# Altium PCB ShifterMatic.PcbDoc
Units mil, origin at the board's own origin, x right, y up, seen from the top; angles counter-clockwise.
Board outline 1200 x 1300 mil, 4 copper layers (Top (L1), GND (L2), Signal (L3), Bottom (L4)), stack 64.6 mil thick; 33 components, 20 nets, 92 pads, 38 vias.
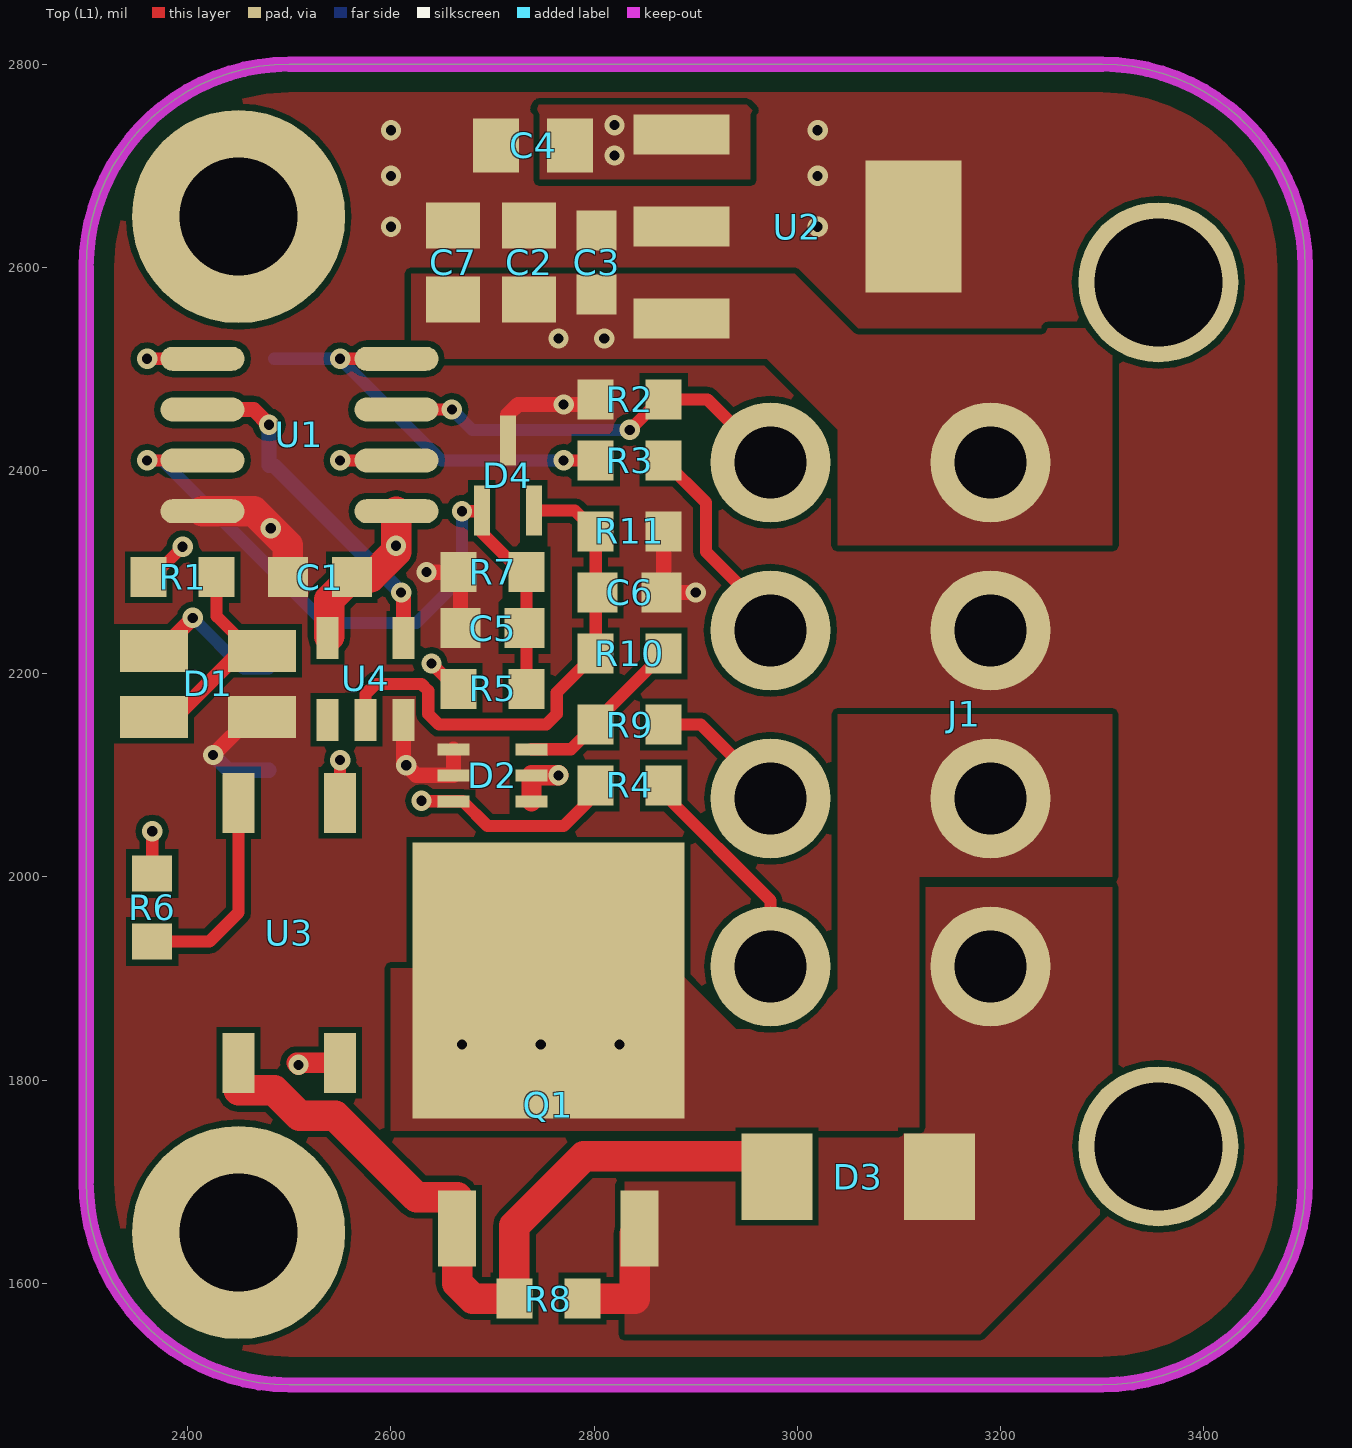
[diagram p0: Top (L1) view]
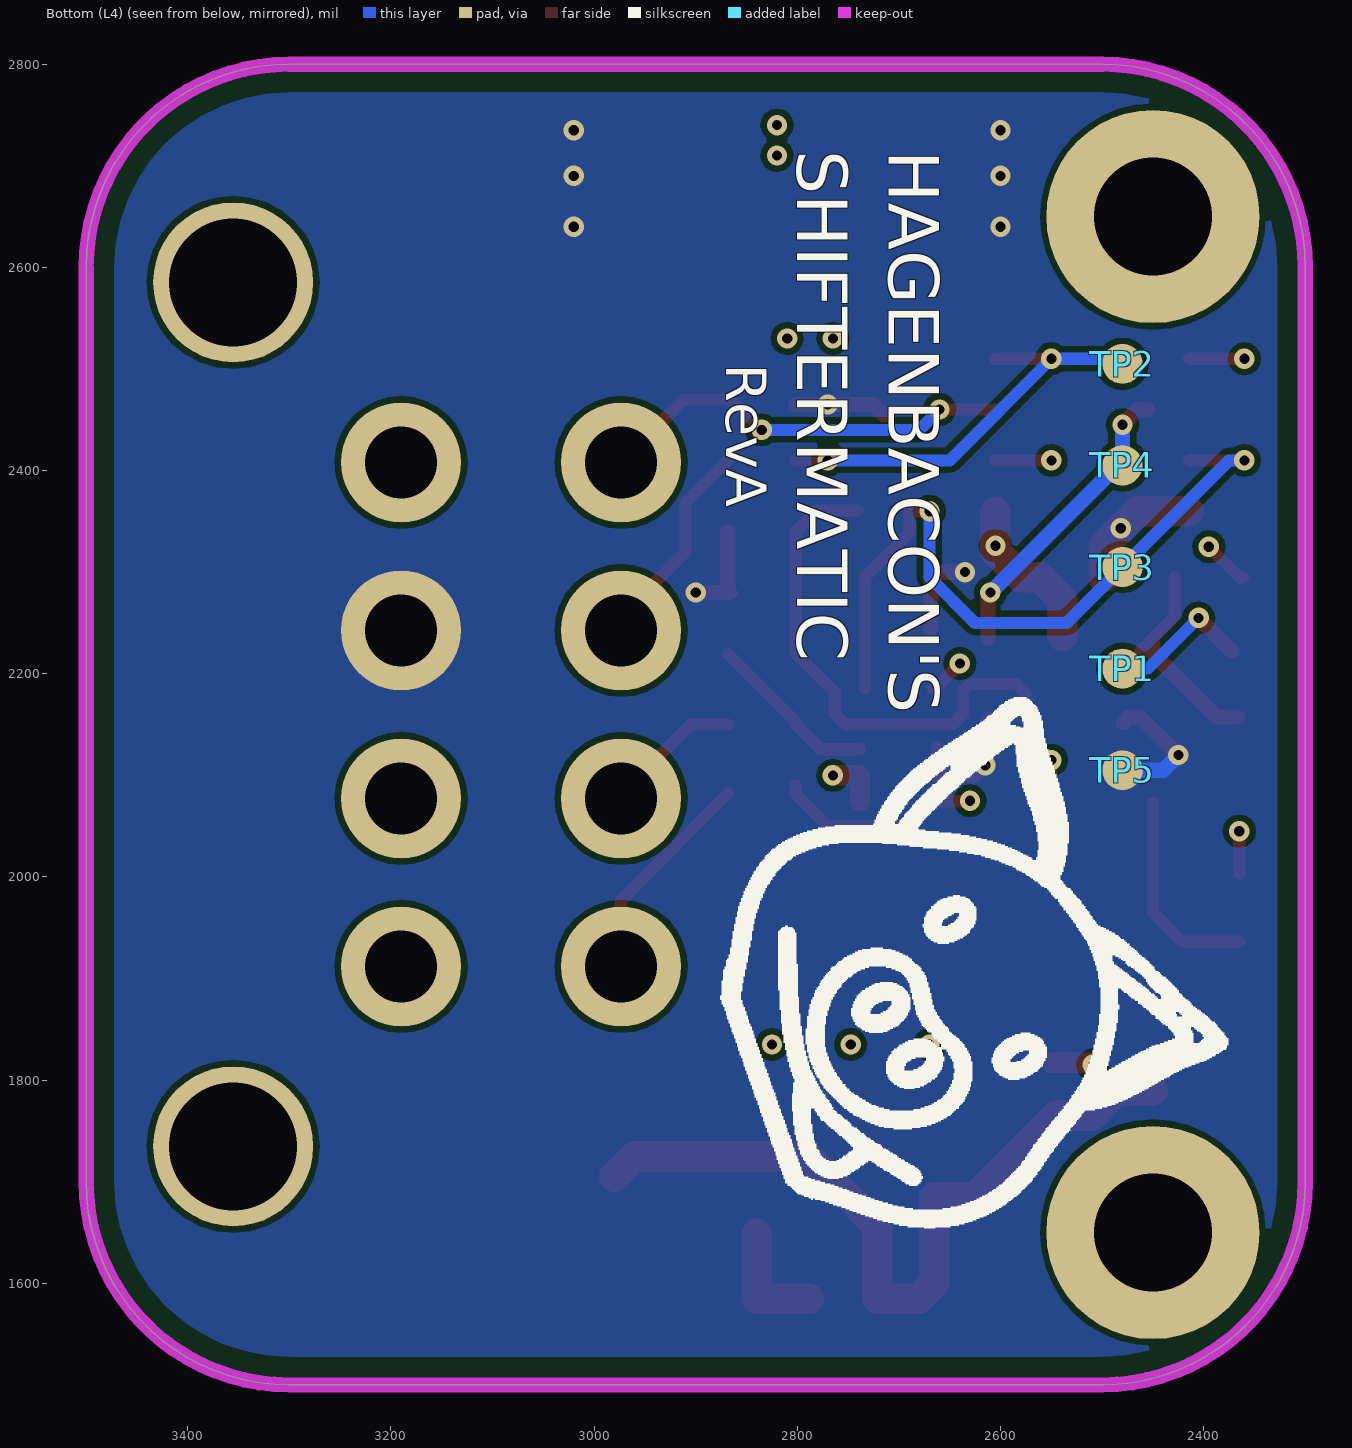
[diagram p1: Bottom (L4) view, seen from below]
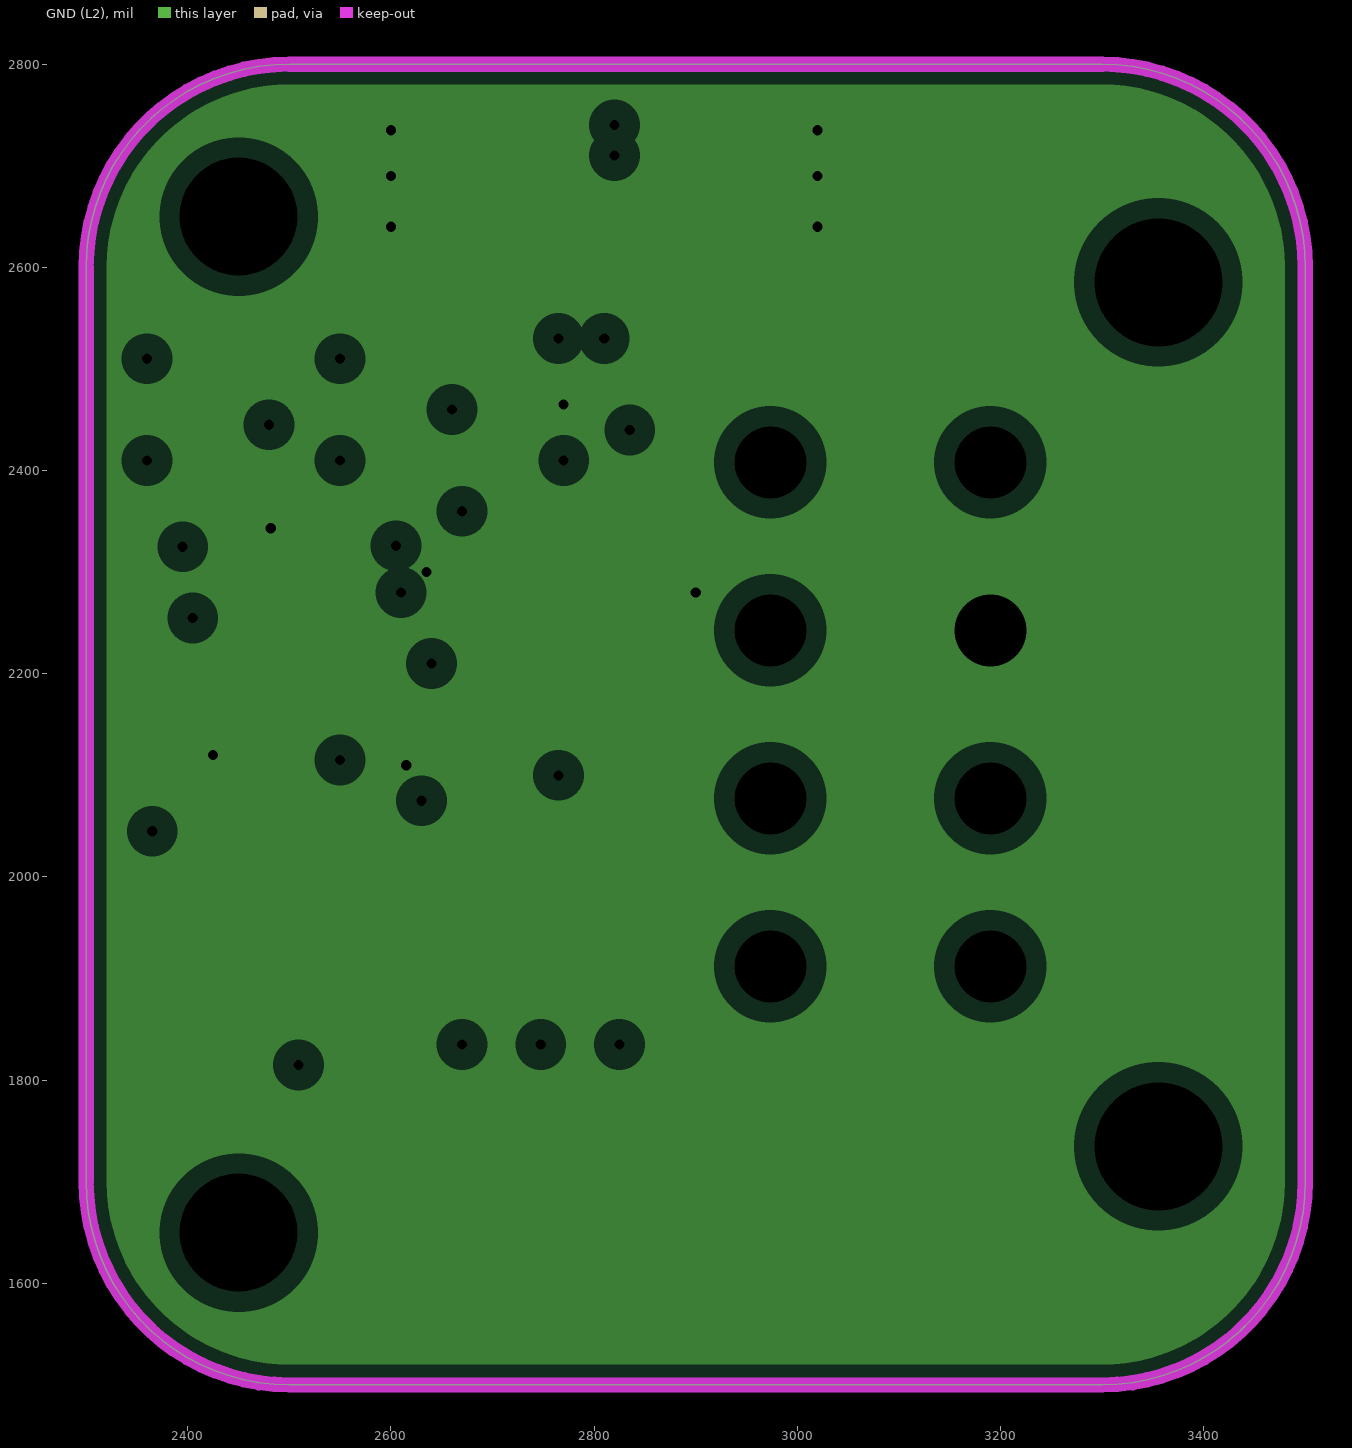
[diagram p2: GND (L2), clearances drawn from the general rule]
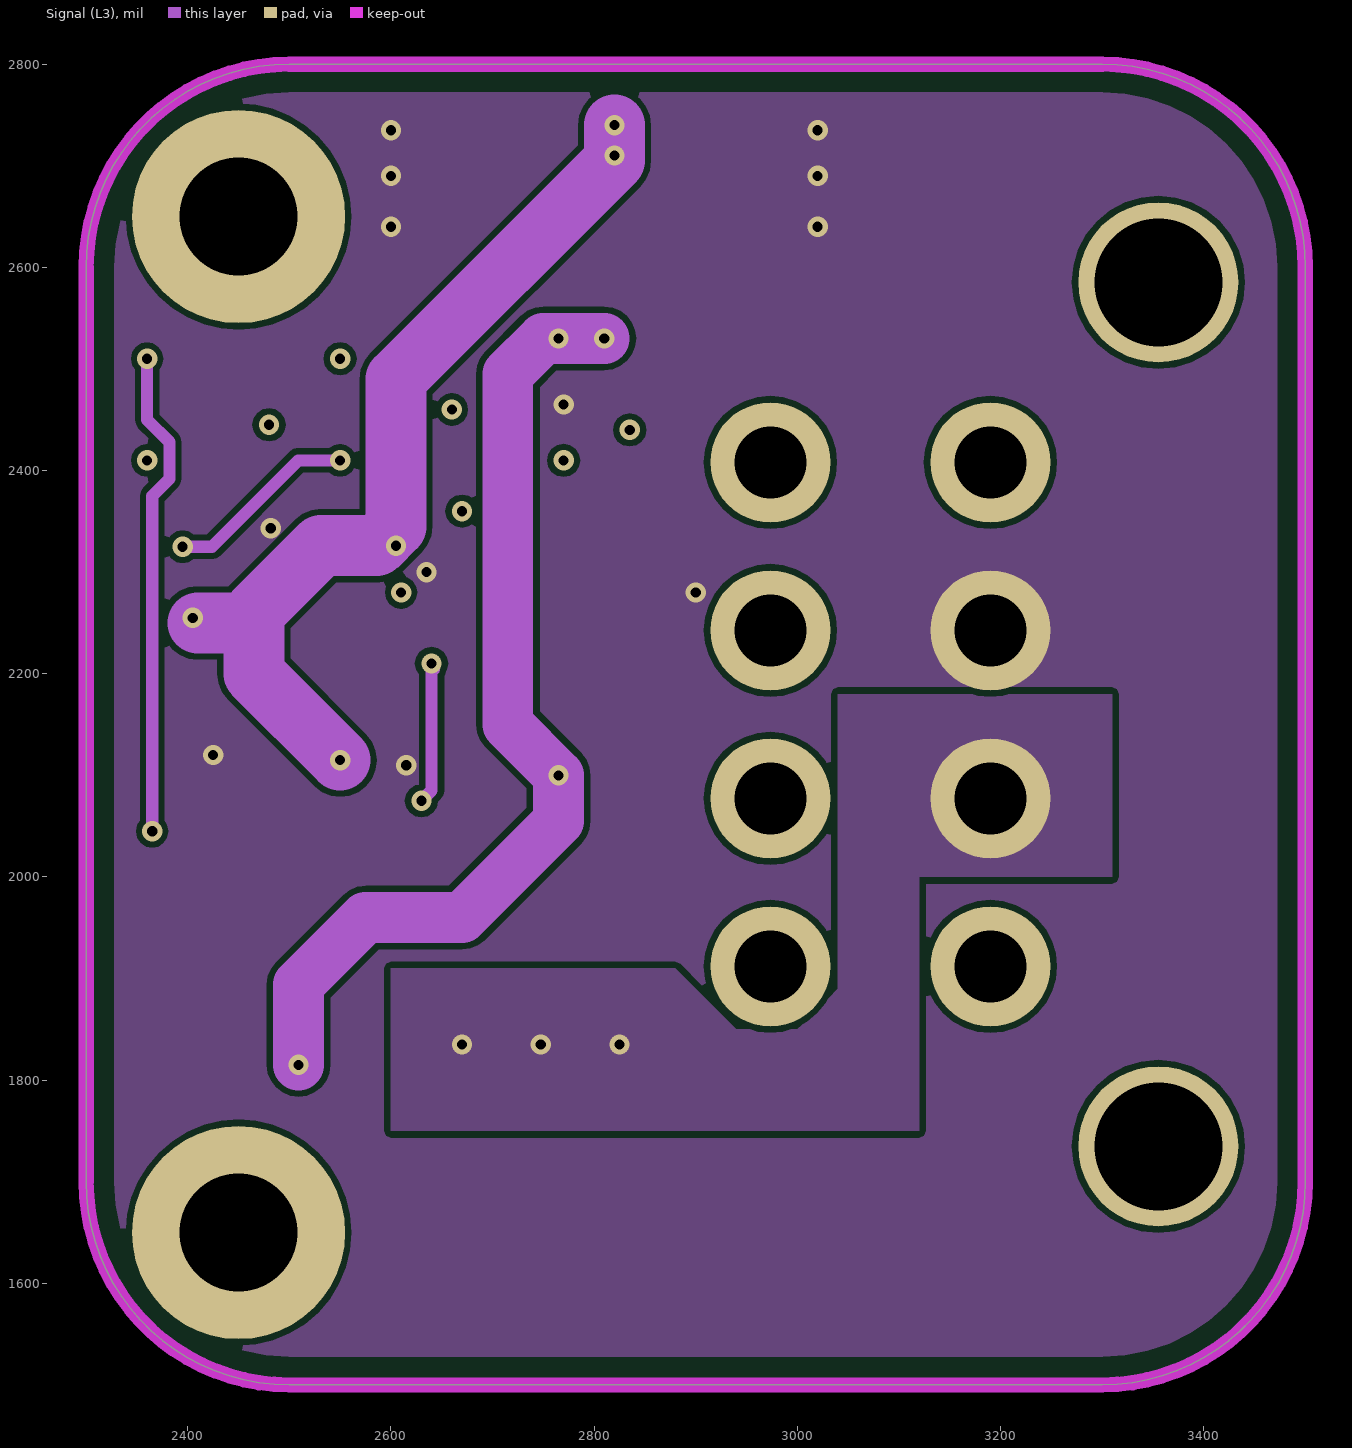
[diagram p3: Signal (L3)]

## Layer stack, top to bottom
Top (L1): signal copper 1.4
Dielectric: core 6.7, FR-4, Dk 4.8
GND (L2): plane copper 0.7, net GND
Dielectric: prepreg 47, FR-4, Dk 4.8
Signal (L3): signal copper 0.7
Dielectric: core 6.7, FR-4, Dk 4.8
Bottom (L4): signal copper 1.4

## Board outline
2300,1700 ccw(c2500,1700) 2500,1500 3300,1500 ccw(c3300,1700) 3500,1700 3500,2600 ccw(c3300,2600) 3300,2800 2500,2800 ccw(c2500,2600) 2300,2600

## Design rules (kind name [scope] priority, off if disabled: settings)
AcuteAngle [All] p1: minimum=8.00000000000000E+0001 checktracksonly=FALSE
Clearance Polygon_BoardEdge [InPolygon vs OnLayer('Keep-Out Layer')] p1: gap=20
Clearance Clearance_1 [All] p2: gap=6
HoleSize [All] p1: absolutevalues=TRUE maxlimit=300 minlimit=10 maxpercent=80.000 minpercent=20.000
MinimumSolderMaskSliver [All] p1: minsoldermaskwidth=4
PasteMaskExpansion [All] p1: expansion=2
PlaneClearance [All] p1: clearance=20
PlaneConnect PlaneConnect_Via [IsVia] p1: planeconnectstyle=Direct reliefexpansion=20 reliefentries=4 reliefconductorwidth=20 reliefairgap=10
PlaneConnect [All] p2: planeconnectstyle=Relief reliefexpansion=20 reliefentries=4 reliefconductorwidth=10 reliefairgap=10
PolygonConnect [All] p1: connectstyle=Direct reliefconductorwidth=30 reliefentries=2 polygonreliefangle="90 Angle" airgapwidth=10
RoutingVias [All] p1: holewidth=10 width=20 viastyle="Through Hole" minholewidth=10 minwidth=18 maxholewidth=28 maxwidth=50
SolderMaskExpansion [All] p1: expansion=4
SolderMaskExpansion SolderMaskExpansion_Vias [IsVia] p2: expansion=0
Width [All] p1: maxlimit=300 minlimit=10 preferedwidth=12
23 further rules are at their usual default settings.

## Components (designator, comment, footprint, x,y, rotation, side; value= is the part's Value field where it differs from the comment)
C1 "0.1µF" CAP_0603 2530,2295 r180 top
C2 "2.2µF" CAP_0805 2736.13,2605 r90 top
C3 "0.1µF" CAP_0603 2802.57,2605 r270 top
C4 "2.2µF" CAP_0805 2740,2720 r180 top
C5 "0.1µF" CAP_0603 2700,2245 r0 top
C6 "0.1µF" CAP_0603 2835,2280 r180 top
C7 "2.2µF" CAP_0805 2661.29,2605 r90 top
D1 "DUAL_LED" KINGBRIGHT_DUAL_SMT_LED 2420,2190 r0 top
D2 "DIODE_ARRAY_BAS40BRW" SOT65P210X110-6N 2700,2100 r0 top
D3 "18.9V" DO-214AC_SMA_NONPOLARIZED 3060,1705 r180 top
D4 "5.1V" SOT65P210X110-3N 2715,2395 r90 top
J1 "HEADER_8" MOLEX_MINIFIT_JR_8_PIN 3190,2160 r270 top
Q1 "N-FET" DPAK228P970X238-3N 2755,1825 r90 top
R1 "300" RES_0603 2395,2295 r180 top
R2 "1k" RES_0603 2835,2470 r180 top
R3 "300" RES_0603 2835,2410 r180 top
R4 "300" RES_0603 2835,2090 r180 top
R5 "11k" RES_0603 2700,2185 r180 top
R6 "300" RES_0603 2365,1970 r270 top
R7 "4.7k" RES_0603 2700,2300 r0 top
R8 "1k" RES_0603 2755,1585 r0 top
R9 "300" RES_0603 2835,2150 r180 top
R10 "11k" RES_0603 2835,2220 r0 top
R11 "4.7k" RES_0603 2835,2340 r180 top
TP1 "VCC" PAD_40MIL 2480,2205 r180 bottom
TP2 "MCLR" PAD_40MIL 2480,2505 r270 bottom
TP3 "DAT" PAD_40MIL 2480,2305 r270 bottom
TP4 "CLK" PAD_40MIL 2480,2405 r270 bottom
TP5 "GND" PAD_40MIL 2480,2105 r270 bottom
U1 "PIC12F675" SOIC127P600X175-8N 2510,2435 r180 top
U2 "LDO_NO_ENABLE" SOT230P700X180-4N 3000,2640 r0 top
U3 "OPTOISOLATOR_DARLINGTON" SOP254P680X220-4N 2500,1945 r270 top
U4 "SCHMITT_TRIGGER" SOT95P245X110-5N 2575,2195 r90 top

## Footprints (in the part's own frame and the unit in brackets; to place one, negate y for a bottom-side part, rotate by r counter-clockwise, add the part's x,y. Pads: shape width x height; smd on the part's side, far side on the other; paste and mask are expansions set on the pad)
CAP_0603 [mm]
  rect 1x1 smd mask+0.076: 1(-0.8,0) 2(0.8,0)
  body extent -0.8,-0.4 0.8,0.4, height 0.86
CAP_0805 [mm] "Chip Capacitor, 2-Leads, Body 2.00x0.94mm, IPC Medium Density"
  rect 1.15x1.35 smd: 1(-0.925,0) 2(0.925,0)
  body extent -1.07,-0.66 1.08,0.66, height 0.65
DO-214AC_SMA_NONPOLARIZED [mil]
  rect 70x85 smd: 1(-80,0) 2(80,0)
  body extent -90,-55 90,55, height 103
DPAK228P970X238-3N [mm]
  rect 1.9x0.95 smd: 1(-4.35,2.28) 3(-4.35,-2.28)
  rect 6.9x6.8 smd: 4(1.85,0)
  body extent -2.5,-3.35 3.7,3.35, height 2.38
KINGBRIGHT_DUAL_SMT_LED [mm] "3.0 x 2.5 x 1.4mm (LxWxH) DUAL SMT LED"
  rect 1.7x1.05 smd: 1(-1.35,-0.825) 2(1.35,-0.825) 3(-1.35,0.825) 4(1.35,0.825)
  body extent -1.5,-1.25 1.5,1.25, height 1.42
MOLEX_MINIFIT_JR_8_PIN [mm]
  round 4 hole 3.2: 0(-10.8,4.2) 0(10.8,4.2)
  round 3 hole 1.8: 1(-6.3,0) 2(-2.1,0) 3(2.1,0) 4(6.3,0) 5(-6.3,-5.5) 6(-2.1,-5.5) 7(2.1,-5.5) 8(6.3,-5.5)
  body extent -14.02,-5.98 13.97,13.92, height 11.02
PAD_40MIL [mm] "40 MIL DIAMETER PAD"
  round 1 smd paste-4 mask+0.076: 1(0,0)
RES_0603 [mm] "Chip Resistor, 2-Leads, Body 1.60x0.82mm, IPC Medium Density"
  rect 0.9x1 smd: 1(-0.85,0) 2(0.85,0)
  body extent -0.85,-0.48 0.85,0.47, height 0.6
SOIC127P600X175-8N [mm] "SOIC, 8-Leads, Body 4.90x3.90mm, Pitch 1.27mm, IPC Medium Density"
  oval 2.1x0.6 smd: 1(-2.425,1.905) 2(-2.425,0.635) 3(-2.425,-0.635) 4(-2.425,-1.905) 5(2.425,-1.905) 6(2.425,-0.635) 7(2.425,0.635) 8(2.425,1.905)
  body extent -1.95,-2.45 1.95,2.45, height 1.75
SOP254P680X220-4N [mm] "SOP, 4-Leads, Body 3.85x4.40mm, Pitch 2.54mm, IPC Medium Density"
  rect 1.5x0.8 smd: 1(-3.25,1.27) 2(-3.25,-1.27) 3(3.25,-1.27) 4(3.25,1.27)
  body extent -2.3,-2.1 2.3,2.1, height 2.2
SOT65P210X110-3N [mm] "SOT23, 3-Leads, Body 2.00x2.10mm, Pitch 0.65mm, IPC Medium Density"
  rect 1.25x0.4 smd: 1(-0.875,0.65) 2(-0.875,-0.65) 3(0.875,0)
  body extent -0.7,-1.1 0.7,1.1, height 1.1
SOT65P210X110-6N [mm] "SOT23, 6-Leads, Body 2.00x2.10mm, Pitch 0.65mm, IPC Medium Density"
  rect 0.8x0.3 smd: 1(-0.975,0.65) 2(-0.975,0) 3(-0.975,-0.65) 4(0.975,-0.65) 5(0.975,0) 6(0.975,0.65)
  body extent -0.7,-1.1 0.7,1.1, height 1.1
SOT95P245X110-5N [mm]
  rect 1.05x0.55 smd: 1(-1.025,0.95) 2(-1.025,0) 3(-1.025,-0.95) 4(1.025,-0.95) 5(1.025,0.95)
  body extent -0.7,-1.5 0.7,1.5, height 1.1
SOT230P700X180-4N [mm] "SOT223, 4-Leads, Body 6.50x7.00mm (avg), Pitch 2.30mm, IPC Medium Density"
  rect 2.4x1 smd: 1(-2.9,2.3) 2(-2.9,0) 3(-2.9,-2.3)
  rect 2.4x3.3 smd: 4(2.9,0)
  body extent -1.85,-3.35 1.85,3.35, height 1.8

## Part data
C1 C2 C3 C4 C5 C6 C7: "Capacitor"
D3: library part TVS_BIDIRECTIONAL
D4: library part DUAL_ZENER_COM_ANODE
R1 R2 R3 R4 R5 R6 R7 R8 R9 R10 R11: "=Description"
TP1 TP2 TP3 TP4 TP5: library part "TestPoint SMT 40mil", "Test Point, 40-mil diameter"

## Free pads (board coordinates)
  round 210 hole 116: 0(2450,2650) 1(2450,1650)

## Via types
v1: diameter 20, hole 10, Top (L1) to Bottom (L4), tented both sides, 38 vias

## Nets (pads, with @x,y where several pads share a name; then routed paths per layer and width w, separated by ;. In a path a pad name is that pad's centre, name@x,y a point inside that pad or via, vN(x,y) a via of type N, cw(c..) or ccw(c..) an arc to the next point about the centre after c; other vN are vias at no path point)
12V: C2.1 C3.2 C7.1 D2.4 D2.5 J1.1 U2.3 U3.4 | length 1069.9
  Top (L1) w20: v1(2509.09,1815) 2507.05,1817.05 U3.4 ; D2.4 D2.5 v1(2765,2100)
  Signal (L3) w50: v1(2509.09,1815) 2509.09,1894.09 2575,1960 2670,1960 2765,2055 v1(2765,2100) 2715,2150 2715,2495 2750,2530 v1(2810,2530)
  other v1: 2765,2530
COIL_GND: D3.1 J1.4 Q1.3 R8.2 | length 115.5
  Top (L1) w30: R8.2 2840,1585 Q1.3@2840,1648.98
COIL_IN: J1.3 Q1.4
  other v1: 2670,1835 2747.5,1835 2825,1835
GND: C1.2 C2.2 C3.1 C4.2 C5.1 C6.1 C7.2 D1.2 D2.1 D2.2 D4.3 J1.2 R2.2 R7.1 R11.1 TP5.1 U1.8 U2.2 U2.4 U4.3 | length 650.8
  Top (L1) w15: v1(2425,2120) 2462.52,2157.52 D1.2 D1.2@2479.25,2151.42 ; v1@2612.4,2112.6 U4.3 ; v1(2615,2110) 2625,2100 D2.2 D2.1 ; v1(2635,2300) R7.1 2668.5,2298.03 C5.1 ; 2715,2455 2725,2465 v1(2770,2465) R2.2@2801.54,2465 ; C6.1 v1(2900,2280) ; C6.1@2868.46,2281.97 R11.1
  Top (L1) w30: U1.8 2465,2360 2498.5,2326.5 C1.2
  Bottom (L4) w15: v1(2425,2120) 2440,2105 TP5.1
  other v1: 2481.75,2343.25 2600,2640 3020,2640 2600,2690 3020,2690 2600,2735 3020,2735
IGNIT_CUT: R6.1 U1.5 | length 577.2
  Top (L1) w12: v1(2360,2510) U1.5 ; R6.1 v1(2365,2045)
  Signal (L3) w12: v1(2360,2510) 2360,2450 2382,2428 2382,2392 2365,2375 v1(2365,2045)
M\C\L\R\: R3.2 TP2.1 U1.4 | length 413.4
  Top (L1) w12: v1(2550,2510) U1.4 ; v1(2770,2410) R3.2
  Bottom (L4) w12: TP2.1@2485,2510 v1(2550,2510) 2650,2410 v1(2770,2410)
NetC6_2: C6.2 D4.2 R10.1 R11.2 U4.2 | length 516.9
  Top (L1) w12: U4.2 2575,2180 2585,2190 2630,2190 2636.82,2183.18 2636.82,2160.34 2647.16,2150 2752.84,2150 2763.18,2160.34 2763.18,2181.65 R10.1 R11.2 2780.98,2360.55 D4.2
NetD1_1: D1.1 D1.4 R1.1 | length 205.6
  Top (L1) w12: R1.1 2428.46,2256.54 D1.4@2462.51,2222.49
  Top (L1) w15: D1.1 2387.52,2157.52 2449.97,2219.97 D1.4@2449.97,2229.97
NetD2_3: D2.3 R4.2 R5.2 | length 379.3
  Top (L1) w12: v1(2630,2075) 2630.59,2074.41 D2.3 2670.59,2074.41 2695,2050 2770,2050 2801.54,2081.54 R4.2 ; v1(2640,2210) 2665,2185 R5.2
  Signal (L3) w12: v1(2630,2075) 2640,2085 2640,2206.63 v1@2642.31,2204.32
NetD2_6: D2.6 R9.2 R10.2 | length 167.9
  Top (L1) w12: D2.6 2777.13,2125.59 R9.2 ; R9.2@2801.54,2153.07 R10.2
NetD3_2: D3.2 Q1.1 R8.1 U3.3 | length 772.6
  Top (L1) w30: U3.3@2450,1790 2485,1790 2510,1765 2545,1765 2625.24,1684.76 2665.24,1684.76 Q1.1 2665.24,1600.24 2680.47,1585 R8.1 2721.54,1656.54 2790,1725 2960,1725 D3.2
NetR1_2: R1.2 U1.2 | length 291.6
  Top (L1) w12: R1.2 2365,2295 v1(2395,2325) ; v1(2550,2410) U1.2
  Signal (L3) w12: v1(2395,2325) 2423.76,2325 2508.76,2410 v1(2550,2410)
NetR6_2: R6.2 U3.2 | length 204.7
  Top (L1) w12: R6.2 2421.54,1936.54 2450,1965 U3.2
SER_DIN: J1.5 R2.1 U1.3 | length 414.4
  Top (L1) w12: U1.3 v1(2660,2460) ; v1(2835,2440) 2865,2470 R2.1 2911.5,2470 J1.5
  Bottom (L4) w12: v1(2660,2460) 2680,2440 v1(2835,2440)
SER_DOUT: J1.6 R3.1 | length 210.8
  Top (L1) w12: R3.1 2910,2368.46 2910,2356.35 2910,2332.12 2910,2320 2973.46,2256.54 J1.6
SWITCH: J1.8 R4.1 | length 213.4
  Top (L1) w12: R4.1@2868.46,2081.84 2973.46,1976.84 J1.8
SWITCH_5V_FILTERED: C5.2 D4.1 R5.1 R7.2 TP3.1 U1.7 | length 727.9
  Top (L1) w12: v1(2360,2410) U1.7 ; v1(2670,2360) 2688.86,2360 D4.1 2689.41,2339.06 2733.46,2295 R5.1
  Bottom (L4) w12: v1(2360,2410) 2375,2410 TP3.1 2535,2250 2625,2250 2670,2295 v1(2670,2360)
TACH: J1.7 R9.1 | length 137.6
  Top (L1) w12: R9.1 2905,2150 2973.46,2081.54 J1.7
TACH_5V_FILTERED: TP4.1 U1.6 U4.4 | length 308.6
  Top (L1) w15: U1.6@2455,2460 2465,2460 v1(2480,2445) ; v1(2610,2280) 2612.4,2277.6 U4.4
  Bottom (L4) w15: 2480,2435 v1(2480,2445) TP4.1 2485,2405 v1(2610,2280)
VCC5: C1.1 C4.1 D1.3 TP1.1 U1.1 U2.1 U3.1 U4.5 | length 1228.9
  Top (L1) w12: U3.1 v1(2550,2115)
  Top (L1) w15: D1.3@2372.48,2222.48 v1(2405,2255)
  Top (L1) w30: U4.5@2539.19,2236.95 2539.19,2272.69 C1.1 2580,2295 2605,2320 U1.1@2605,2359.53
  Signal (L3) w60: v1@2410,2250 2465,2250 2465,2200 v1(2550,2115) ; 2465,2260 2531,2326 2586,2326 2605,2345 2605,2490 2820,2705 v1(2820,2740)
  Bottom (L4) w12: v1(2405,2255) 2455,2205 TP1.1
  other v1: 2605,2326 2820,2710
pads on no net: J1.0 U4.1

## Polygon pours and split planes (outlines as drawn)
COIL_IN on Top (L1) "COIL_IN" (solid, pour order 15): 3310,2000 3310,2160 3040,2160 3040,1890 3000,1850 2940,1850 2880,1910 2600,1910 2600,1750 3120,1750 3120,2000
GND on Top (L1) "GND_TOP" (solid, pour order 23): 2300,2625 2375,2750 2500,2800 3300,2800 3450,2750 3500,2550 3500,1675 3450,1550 3325,1500 2450,1500 2350,1550 2300,1675
COIL_GND on Top (L1) "COIL_GND" (solid, pour order 20): 3310,1990 3120,1990 3120,1810 3067.5,1757.5 3021,1757.5 3020,1756.5 3020,1670 2940,1670 2940,1700 2830,1700 2830,1550 3180,1550 3310,1680
GND on Top (L1) "GND" (solid, pour order 17): 3060,2540 3240,2540 3240,2760 2970,2760 2960,2750 2960,2680 2740,2680 2740,2750 2730,2760 2550,2760 2550,2600 3000,2600
12V on Top (L1) "12V" (solid, pour order 19): 3310,2320 3040,2320 3040,2440 2970,2510 2620,2510 2620,2610 2990,2610 3060,2540 3310,2540
VCC5 on Top (L1) "VCC5" (solid, pour order 18): 2960,2680 2960,2750 2950,2760 2740,2760 2740,2680
GND on Top (L1) "GND" (solid, pour order 16): 3040,2178.56 3040,2320 3310,2320 3310,2180
GND on Signal (L3) "GND_INNER" (solid, pour order 22): 2300,2625 2375,2750 2500,2800 3300,2800 3450,2750 3500,2550 3500,1675 3450,1550 3325,1500 2450,1500 2350,1550 2300,1675
COIL_IN on Signal (L3) "COIL_IN" (solid, pour order 13): 3310,2000 3310,2180 3040,2180 3040,1890 3000,1850 2940,1850 2880,1910 2600,1910 2600,1750 3120,1750 3120,2000
GND on Bottom (L4) "GND_BOTTOM" (solid, pour order 22): 2300,2625 2375,2750 2500,2800 3300,2800 3450,2750 3500,2550 3500,1675 3450,1550 3325,1500 2450,1500 2350,1550 2300,1675
GND on GND (L2) (split plane): 3311.77,2779.61 3323.49,2778.46 3335.12,2776.54 3346.59,2773.86 3357.86,2770.44 3368.88,2766.3 3379.61,2761.43 3390,2755.88 3400,2749.66 3409.57,2742.8 3418.68,2735.33 3427.28,2727.28 3435.33,2718.68 3442.8,2709.57 3449.66,2700 3455.88,2690 3461.43,2679.61 3466.29,2668.88 3470.44,2657.86 3473.86,2646.59 3476.54,2635.12 3478.46,2623.49 3479.61,2611.77 3479.97,2600.71 3479.9,2600 3479.9,1700 3479.97,1699.29 3479.61,1688.23 3478.46,1676.51 3476.54,1664.88 3473.86,1653.41 3470.44,1642.14 3466.3,1631.12 3461.43,1620.39 3455.88,1610 3449.66,1600 3442.8,1590.43 3435.33,1581.32 3427.28,1572.72 3418.68,1564.67 3409.57,1557.2 3400,1550.34 3390,1544.12 3379.61,1538.57 3368.88,1533.71 3357.86,1529.56 3346.59,1526.14 3335.12,1523.46 3323.49,1521.54 3311.77,1520.39 3300.71,1520.03 3300,1520.1 2500,1520.1 2499.29,1520.03 2488.23,1520.39 2476.51,1521.54 2464.88,1523.46 2453.41,1526.14 2442.14,1529.56 2431.12,1533.71 2420.39,1538.57 2410,1544.12 2400,1550.34 2390.43,1557.2 2381.32,1564.67 2372.72,1572.72 2364.67,1581.32 2357.2,1590.43 2350.34,1600 2344.12,1610 2338.57,1620.39 2333.7,1631.12 2329.56,1642.14 2326.14,1653.41 2323.46,1664.88 2321.54,1676.51 2320.39,1688.23 2320.03,1699.29 2320.1,1700 2320.1,2600 2320.03,2600.71 2320.39,2611.77 2321.54,2623.49 2323.46,2635.12 2326.14,2646.59 2329.56,2657.86 2333.71,2668.88 2338.57,2679.61 2344.12,2690 2350.34,2700 2357.2,2709.57 2364.67,2718.68 2372.72,2727.28 2381.32,2735.33 2390.43,2742.8 2400,2749.66 2410,2755.88 2420.39,2761.43 2431.12,2766.3 2442.14,2770.44 2453.41,2773.86 2464.88,2776.54 2476.51,2778.46 2488.23,2779.61 2499.29,2779.97 2500,2779.9 3300,2779.9 3300.71,2779.97

## Keep-outs
Keep-Out Layer:
  lines w15: 2300,2600 cw(c2500,2600) 2500,2800 3300,2800 cw(c3300,2600) 3500,2600 ; 2300,2600 2300,2600 ; 2300,2600 2300,1700 ccw(c2500,1700) 2500,1500 ; 2500,1500 2500,1500 ; 2500,1500 3300,1500 ; 3300,1500 ccw(c3300,1700) 3500,1700 3500,2600 ; 3300,1500 3300,1500 ; 3500,2600 3500,2600

## Silkscreen, mask and mechanical layers (free items; w line width, h text height)
Bottom Overlay:
  drawing of 6 lines, arcs and shapes, not listed
  text "HAGENBACON'S" at 2710,2715 h50 r90
  text "SHIFTERMATIC" at 2800,2715 h50 r90
  text "RevA" at 2870,2505.07 h40 r90